# Altium PCB PCB.PcbDoc
Units mm, origin at the board's own origin, x right, y up, seen from the top; angles counter-clockwise.
Board outline 93.98 x 24.13 mm, 2 copper layers (Component Side, Bottom Layer), stack 1.571 mm thick; 85 components, 73 nets, 352 pads, 96 vias.
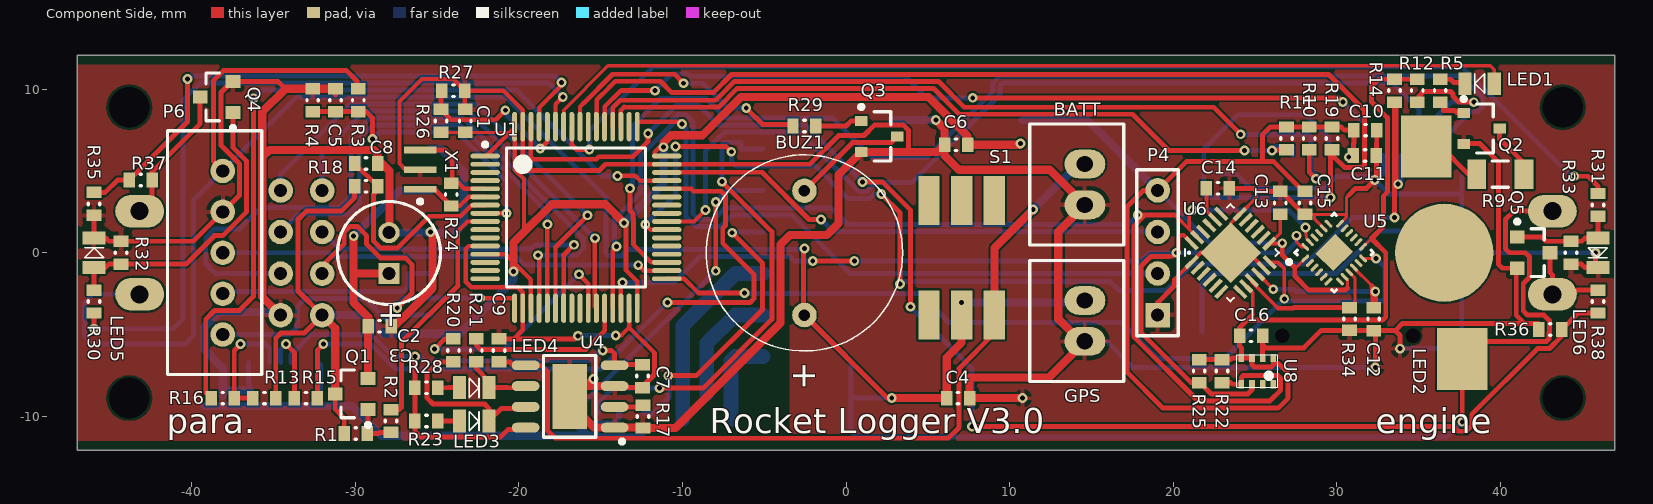
[diagram p0: Component Side view]
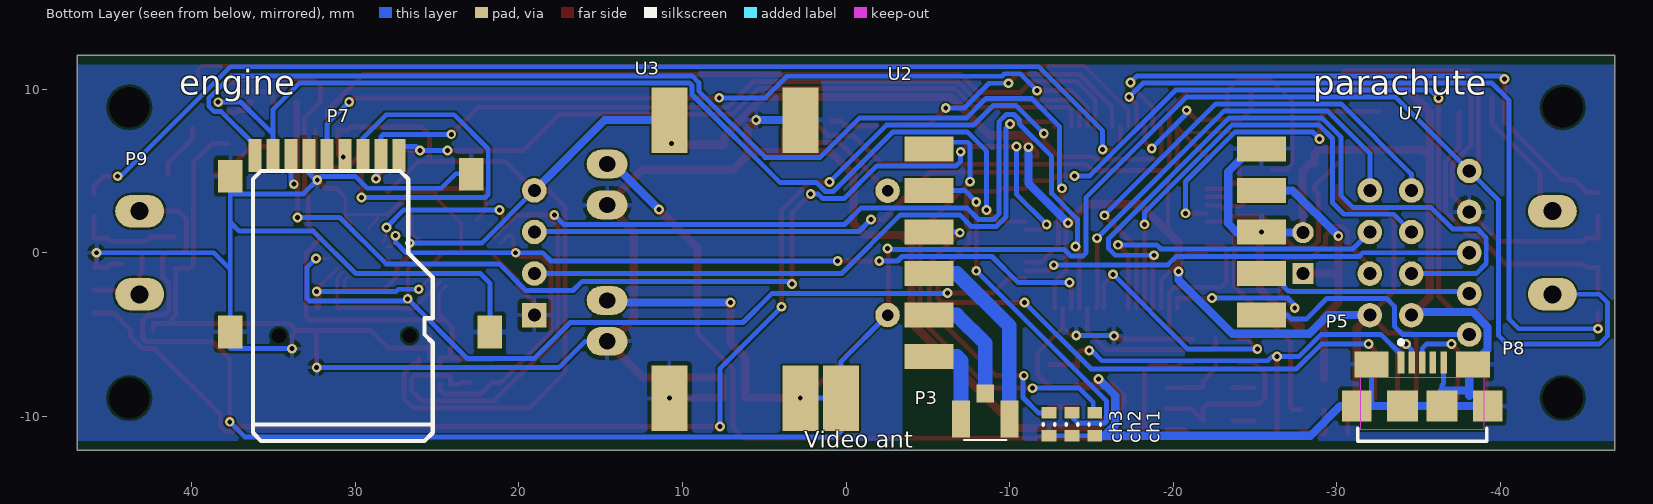
[diagram p1: Bottom Layer view, seen from below]

## Layer stack, top to bottom
Top Solder: solder mask 0.0102, Solder Resist, Dk 3.5
Component Side: signal copper 0.0356
Dielectric 1: core 1.5, FR-4, Dk 4.2
Bottom Layer: signal copper 0.0356
Solder Side: solder mask 0.0102, Solder Resist, Dk 3.5

## Board outline
-46.99,-12.065 -46.99,12.065 46.99,12.065 46.99,-12.065

## Design rules (kind name [scope] priority, off if disabled: settings)
Clearance [All] p1: gap=0.127 ignorepadtopadclearanceinfootprint=TRUE
ComponentClearance [All] p1: gap=0.5 collisioncheckmode=3 verticalgap=0 showdistances=TRUE
HoleSize [All] p1: absolutevalues=TRUE maxlimit=6.3 minlimit=0.2 maxpercent=80.000 minpercent=20.000
HoleToHoleClearance [All] p1: gap=0.254 allowstackedmicrovias=FALSE
MinimumAnnularRing [All] p1: minimumring=0.076
MinimumSolderMaskSliver [All] p1 off: minsoldermaskwidth=0.254
PolygonConnect [All] p1: connectstyle=Relief reliefconductorwidth=0.254 reliefentries=4 polygonreliefangle="90 Angle" airgapwidth=0.254
RoutingVias [All] p1: holewidth=0.3 width=0.6 viastyle="Through Hole" minholewidth=0.3 minwidth=0.6 maxholewidth=0.6 maxwidth=1.27
SMDEntry [All] p1: side=TRUE corner=TRUE anyangle=TRUE
SMDNeckDown [All] p1: percent=90.000
SMDToCorner [All] p1: distance=39370
SilkToSilkClearance [All] p1 off: silktosilkclearance=0.254
SilkToSolderMaskClearance [IsPad] p1 off: minsilkscreentomaskgap=0.254 clearancetoexposedcopper=TRUE
SolderMaskExpansion [All] p1: expansion=0.102
UnRoutedNet [All] p1: checkbadconnections=TRUE
Width [All] p1: maxlimit=2 minlimit=0.127 preferedwidth=0.3
23 further rules are at their usual default settings.

## Components (designator, comment, footprint, x,y, rotation, side; value= is the part's Value field where it differs from the comment)
BATT "BATT" XH2.54-2 14.605,4.171 r270 top (schematic designator P1)
BUZ1 "Buzzer" BUZ12X7,6MM -2.54,3.83 r270 top
C1 "100nF" CAPC0603(1608)100_L -23.279,8.058 r270 top
C2 "680uF 6.3V" CAPPR55-250-1120X630X1220 -27.94,-0.02 r90 top locked
C3 "1uF" CAPC0603(1608)100_L -28.51,-4.491 r0 top
C4 "4.7uF" CAPC0603(1608)100_L 6.858,-8.89 r180 top
C5 "100pF" CAPC0603(1608)100_L -31.211,9.321 r270 top value=100nF
C6 "4.7uF" CAPC0603(1608)100_L 6.731,6.604 r0 top
C7 "1uF" CAPC0603(1608)100_L -12.446,-7.544 r270 top
C8 "100pF" CAPC0603(1608)100_L -29.337,5.461 r180 top value=100nF
C9 "1uF" CAPC0603(1608)100_L -21.209,-5.969 r270 top
C10 "4.7uF" CAPC0603(1608)100_L 31.75,7.493 r180 top
C11 "100nF" CAPC0603(1608)100_L 31.72,5.945 r180 top
C12 "100nF" CAPC0603(1608)100_L 32.258,-4.064 r90 top
C13 "100nF" CAPC0603(1608)100_L 26.543,3.048 r90 top
C14 "2.2nF" CAPC0603(1608)100_L 22.733,3.937 r180 top
C15 "1uF" CAPC0603(1608)100_L 28.067,3.048 r90 top
C16 "100nF" CAPC0603(1608)100_L 24.765,-5.08 r180 top
ch1 "jumper" "RES 0603 (1608) L" -15.209,-10.491 r270 bottom (schematic designator R8)
ch2 "jumper" "RES 0603 (1608) L" -13.812,-10.491 r270 bottom (schematic designator R7)
ch3 "jumper" "RES 0603 (1608) L" -12.415,-10.491 r270 bottom (schematic designator R6)
GPS "EXT_POW" XH2.54-2 14.605,-4.171 r270 top (schematic designator P2)
LED1 "0805 LED" "0805 LED" 38.735,10.338 r180 top
LED2 "3W LED" "3W LED red" 36.576,0 r90 top locked
LED3 "0805 LED" "0805 LED" -22.733,-10.287 r0 top
LED4 "0805 LED" "0805 LED" -22.733,-8.255 r0 top
LED5 "0805 LED" "0805 LED" -45.974,0 r90 top
LED6 "0805 LED" "0805 LED" 45.974,0 r270 top
P3 "IPX" IPX -8.509,-10.16 r0 bottom
P4 "PROG" PLS-4 19.05,-3.81 r90 top
P5 "MicroUsb connector" "MicroUsb connector" -35.23,-9.377 r180 bottom
P6 "XH2.54-5" XH2.54-5 -38.1,0 r270 top locked
P7 "microSD connector" "Micro SD holder + card" 36.12,5.945 r180 bottom locked
P8 "para teminal" screw-con-2 -43.18,-2.54 r90 bottom locked
P9 "engine terminal" screw-con-2 43.18,2.54 r270 bottom locked
Q1 "SI2301" "SOT23-3 L" -30.226,-8.636 r180 top
Q2 "MMBT2222A" INF-SOT23_L 38.862,7.595 r0 top
Q3 "MMBT2222A" INF-SOT23_L 2.032,7.112 r0 top
Q4 "SI2302" "SOT23-3 L" -38.481,9.525 r180 top
Q5 "SI2302" "SOT23-3 L" 42.037,0 r0 top
R1 "10K" "RES 0603 (1608) L" -29.972,-11.049 r180 top
R2 "82R" "RES 0603 (1608) L" -27.813,-10.287 r270 top
R3 "10K" "RES 0603 (1608) L" -29.814,9.321 r270 top
R4 "1.5K" "RES 0603 (1608) L" -32.608,9.321 r90 top
R5 "82R" "RES 0603 (1608) L" 36.322,9.906 r90 top
R9 "5.6R" "RES 1206 (3216) N" 40.005,4.801 r180 top
R10 "10K" "RES 0603 (1608) L" 28.321,6.985 r270 top
R11 "10K" "RES 0603 (1608) L" 26.924,6.985 r270 top
R12 "10K" "RES 0603 (1608) L" 34.925,9.906 r270 top
R13 "1.5K" "RES 0603 (1608) L" -35.56,-8.89 r0 top
R14 "10K" "RES 0603 (1608) L" 33.528,9.906 r270 top
R15 "22R" "RES 0603 (1608) L" -33.02,-8.89 r0 top
R16 "22R" "RES 0603 (1608) L" -38.1,-8.89 r180 top
R17 "1.5K" "RES 0603 (1608) L" -12.415,-10.016 r90 top
R18 "10K" "RES 0603 (1608) L" -29.337,4.064 r0 top
R19 "10K" "RES 0603 (1608) L" 29.718,6.985 r90 top
R20 "1.5K" "RES 0603 (1608) L" -24.003,-5.969 r90 top
R21 "1.5K" "RES 0603 (1608) L" -22.606,-5.969 r90 top
R22 "1.5K" "RES 0603 (1608) L" 22.987,-7.239 r270 top
R23 "1.5K" "RES 0603 (1608) L" -25.654,-10.287 r0 top
R24 "1M" "RES 0603 (1608) L" -24.13,3.556 r90 top
R25 "1.5K" "RES 0603 (1608) L" 21.59,-7.239 r270 top
R26 "jumper" "RES 0603 (1608) L" -24.765,8.058 r270 top
R27 "10K" "RES 0603 (1608) L" -24.003,9.906 r180 top
R28 "1.5K" "RES 0603 (1608) L" -25.654,-8.255 r0 top
R29 "82R" "RES 0603 (1608) L" -2.54,7.747 r180 top
R30 "82R" "RES 0603 (1608) L" -45.974,-2.986 r270 top
R31 "82R" "RES 0603 (1608) L" 45.974,2.921 r90 top
R32 "1.5K" "RES 0603 (1608) L" -44.323,0 r90 top
R33 "1.5K" "RES 0603 (1608) L" 44.323,0 r270 top
R34 "10K" "RES 0603 (1608) L" 30.786,-4.051 r270 top
R35 "10K" "RES 0603 (1608) L" -45.974,2.986 r270 top
R36 "10K" "RES 0603 (1608) L" 43.053,-4.699 r180 top
R37 "1.5K" "RES 0603 (1608) L" -43.115,4.445 r0 top
R38 "1.5K" "RES 0603 (1608) L" 45.974,-2.986 r90 top
S1 "DPDT" "DPDT  5.8mm SMD" 5.57,-3.81 r90 top
U1 "STM32F103RCT6" STM-LQFP64_N -16.51,2.159 r0 top
U2 "TX5823" TX5823 -15.24,1.27 r0 bottom locked
U3 "DC-DC" "DC-DC step up down S9" 2.795,9.11 r270 bottom locked
U4 "TP4056" "SOP-8 N pad" -16.891,-8.788 r180 top
U5 "MPU-9250" QFN40P300X300X105_HS-25L 29.845,0.007 r45 top
U6 "MPU-6050" QFN-24-4MM2 23.495,0 r45 top
U7 "NRF24L01+" "NRF24l01 ant" -34.565,3.803 r270 bottom locked
U8 "BMP280" "LGA-8 BMP280" 25.146,-7.239 r270 top
X1 "8MHz" MURA-CSTCE_G_A-3_V -26.035,5.08 r90 top

## Footprints (in the part's own frame and the unit in brackets; to place one, negate y for a bottom-side part, rotate by r counter-clockwise, add the part's x,y. Pads: shape width x height; smd on the part's side, far side on the other; paste and mask are expansions set on the pad)
"3W LED red" [mm]
  rect 3.8x3.1 smd: A(-6.5,-1.1) K(6.5,1.1)
  round 6 smd: t-pad(0,0)
  body extent -7.09,-4 7.59,4, height 5.96
"0805 LED" [mm] "Chip Resistor, Body 2.0x1.2mm, IPC High Density"
  rect 0.8x1.4 smd: 1(-0.894,0.008) 2(0.903,0.008)
  silkscreen extent -0.3,-0.6 0.3,0.57, body extent -1.1,-0.73 1.1,0.72, height 1.4
BUZ12X7,6MM [mm]
  round 1.5 hole 0.7: 1(0.04,0) 2(7.64,0)
  silkscreen extent -2.16,-6 9.84,6, body extent -2.16,-6 9.84,6, height 9.5
CAPC0603(1608)100_L [mm] "Chip Capacitor, Body 1.6x0.8mm, Height 1.0mm, IPC High Density"
  rect 0.7x0.9 smd: 1(-0.7,0) 2(0.7,0)
  silkscreen extent -0.05,-0.35 0.05,0.35, body extent -0.87,-0.47 0.88,0.48, height 1
CAPPR55-250-1120X630X1220 [mm] "THD, 2-Leads, Dia 6.3mm, Body Length 11.2mm"
  rect 1.3x1.3 hole 0.8: 1(-1.25,0)
  round 1.3 hole 0.8: 2(1.25,0)
  silkscreen extent -3.15,-3.15 3.15,3.15, body extent -3.15,-3.15 3.16,3.15, height 12.21
"DC-DC step up down S9" [mm]
  rect 4x2.2 smd: 1(1,0) 2(1,-8) 3(18,-8) 4(18,0) 5(18,2.5)
  body extent 0,-10.03 19,3.97, height 4.01
"DPDT  5.8mm SMD" [mm]
  rect 3x1.3 smd: 1(0,0.5) 2(0,-1.5) 3(0,-3.5) 4(7,-3.5) 5(7,-1.5) 6(7,0.5)
  body extent -0.85,-4.35 7.85,1.35, height 10.31
INF-SOT23_L [mm] "SOT23, 3-Leads, Body 2.9x1.3 mm, Pitch 0.95 mm, IPC High Density"
  rect 0.75x0.6 smd: 1(-1.1,0.95) 2(-1.1,-0.95) 3(1.1,0)
  silkscreen extent -1.22,-1.5 0.7,1.92, body extent -0.7,-1.5 0.7,1.5, height 1.1
IPX [mm]
  rect 1.1x2.25 smd: 1(-1.475,0) 2(1.475,0)
  rect 1.05x1.1 smd: 3(0,-1.55)
  silkscreen extent -1.3,1.3 1.3,1.3, body extent -1.5,-1.55 1.5,1.3, height 1.29
"LGA-8 BMP280" [mm]
  rect 0.5x0.35 smd paste-25.4 mask-25.4: 1(0.8,0.975) 2(0.8,0.325) 3(0.8,-0.325) 4(0.8,-0.975) 5(-0.8,-0.975) 6(-0.8,-0.325) 7(-0.8,0.325) 8(-0.8,0.975)
  silkscreen extent -1,-1.25 1,1.25, body extent -1,-1.25 1,1.25, height 1
"Micro SD holder + card" [mm]
  rect 1.5x2 smd: 0(-1.524,-10.795) 0(-1.524,-1.27) 0(13.208,-1.143) 0(14.351,-10.795)
  rect 0.8x2 smd: 1(8.8,0) 2(7.7,0) 3(6.6,0) 4(5.5,0) 5(4.4,0) 6(3.3,0) 7(2.2,0) 8(1.1,0) 9(0,0)
  round 0 hole 0.9 unplated: ""(1.45,-11.025) ""(9.45,-11.025)
  silkscreen extent -0.14,-17.45 10.86,-0.95, body extent -1.65,-17.53 14.66,0.18, height 2.25
"MicroUsb connector" [mm] "SMT, 5-Leads, Body 7.9x5mm, Pitch 0.65mm"
  rect 0.4x1.35 smd: 1(-1.3,2.675) 2(-0.65,2.675) 3(0,2.675) 4(0.65,2.675) 5(1.3,2.675)
  rect 2.1x1.6 smd: 6(3.1,2.55) 7(-3.1,2.55)
  rect 1.8x1.9 smd: 8(-4,0) 9(4,0)
  rect 1.9x1.9 smd: 10(1.2,0) 11(-1.2,0)
  Component Side keep-out region: -3.75,1.75 3.75,1.75 3.75,-1.45 -3.75,-1.45
  silkscreen extent -3.95,-2.15 3.95,4.02, body extent -3.9,-2.33 3.9,2.67, height 2.68
MURA-CSTCE_G_A-3_V [mm] "SMD, 3-Leads, Body 3.2x1.3mm, Pitch 1.2mm"
  rect 0.4x2 smd: 1(-1.2,0) 2(0,0) 3(1.2,0)
  silkscreen extent -2.07,-0.12 -1.83,0.12, body extent -1.6,-0.65 1.6,0.65, height 0.7
"NRF24l01 ant" [mm]
  round 1.5 hole 0.8: 1(7.62,0) 2(7.62,-2.54) 3(5.08,0) 4(5.08,-2.54) 5(2.54,0) 6(2.54,-2.54) 7(0,0) 8(0,-2.54)
  body extent -4.13,-41.13 11.83,2.13, height 6
PLS-4 [mm]
  rect 1.5x1.5 hole 0.8: 1(0,0)
  round 1.5 hole 0.8: 2(2.54,0) 3(5.08,0) 4(7.62,0)
  silkscreen extent -1.27,-1.27 8.89,1.27, body extent -1.27,-1.27 8.89,1.27, height 8.44
QFN40P300X300X105_HS-25L [mm] "QFN, 24-Leads, Body 3.00x3.00mm, Pitch 0.40mm, Thermal Pad 1.70x1.54mm, IPC High Density"
  oval 0.6x0.2 smd: 1(-1.5,1) 2(-1.5,0.6) 3(-1.5,0.2) 4(-1.5,-0.2) 5(-1.5,-0.6) 6(-1.5,-1) 13(1.5,-1) 14(1.5,-0.6) 15(1.5,-0.2) 16(1.5,0.2) 17(1.5,0.6) 18(1.5,1)
  oval 0.2x0.6 smd: 7(-1,-1.5) 8(-0.6,-1.5) 9(-0.2,-1.5) 10(0.2,-1.5) 11(0.6,-1.5) 12(1,-1.5) 19(1,1.5) 20(0.6,1.5) 21(0.2,1.5) 22(-0.2,1.5) 23(-0.6,1.5) 24(-1,1.5)
  rect 1.7x1.54 smd: 25(0,0)
  silkscreen extent -2.47,-1.7 1.7,1.7, body extent -1.55,-1.55 1.55,1.55, height 1.05
QFN-24-4MM2 [mil]
  rect 40x10 smd paste-1000 mask-1000: 1(-81.35,49.48) 2(-81.35,29.51) 3(-81.35,9.74) 4(-81.35,-11.32) 5(-81.35,-31.18) 6(-81.35,-51.05) 13(82.13,-51.05) 14(82.13,-31.18) 15(82.13,-11.32) 16(82.13,9.74) 17(82.13,29.51) 18(82.13,49.48)
  rect 10x40 smd paste-1000 mask-1000: 7(-49.87,-83.53) 8(-30,-83.53) 9(-10.14,-83.53) 10(10.92,-83.53) 11(30.69,-83.53) 12(50.66,-83.53) 19(50.66,81.95) 20(30.69,81.95) 21(10.92,81.95) 22(-10.14,81.95) 23(-30,81.95) 24(-49.87,81.95)
  rect 103x103 smd mask-1000: 18(0.79,-0.39)
  silkscreen extent -83,-83 83,83, body extent -80,-80 80,80, height 35
"RES 0603 (1608) L" [mm] "Chip Resistor, Body 1.6x0.8mm, IPC High Density"
  rect 0.7x0.9 smd: 1(-0.7,0) 2(0.7,0)
  silkscreen extent -0.05,-0.35 0.05,0.35, body extent -0.8,-0.4 0.8,0.4, height 0.45
"RES 1206 (3216) N" [mm] "Chip Resistor, Body 3.2x1.6mm, IPC Medium Density"
  rect 1.15x1.8 smd: 1(-1.45,0) 2(1.45,0)
  silkscreen extent -0.5,-0.8 0.5,0.8, body extent -1.55,-0.77 1.55,0.78, height 0.55
screw-con-2 [mm] "2.54"
  oval 2x3 hole 1.1: 1(0,0) 2(5.08,0)
  body extent -2.46,-3.74 7.54,4.06, height 10.2
"SOP-8 N pad" [mm] "TSOP, 8-Leads, Body 4,90x3,95mm, Pitch 1,27mm, Thermal Pad 4,00x2,10mm, IPC Medium Density"
  oval 1.7x0.6 smd: 1(-2.746,1.905) 2(-2.746,0.635) 3(-2.746,-0.635) 4(-2.746,-1.905) 5(2.692,-1.905) 6(2.692,-0.635) 7(2.692,0.635) 8(2.692,1.905)
  rect 2.1x4 smd: PAD(0,0)
  silkscreen extent -3.33,-2.5 1.6,2.88, body extent -3.02,-2.51 3.02,2.51, height 1.6
"SOT23-3 L" [mm] "SOT23, 3-Leads, Body 2.92x1.3mm, Pitch 0.95mm"
  rect 0.9x0.8 smd: 1(-1,0.95) 2(-1,-0.95) 3(1,0)
  silkscreen extent -1.13,-1.46 0.65,2.02, body extent -1.25,-1.5 1.25,1.5, height 1.11
STM-LQFP64_N [mm] "Thin QFP, 64-Leads, Body 10x10mm, Pitch 0.5mm, IPC Medium Density"
  oval 1.8x0.3 smd: 1(-5.55,3.75) 2(-5.55,3.25) 3(-5.55,2.75) 4(-5.55,2.25) 5(-5.55,1.75) 6(-5.55,1.25) 7(-5.55,0.75) 8(-5.55,0.25) 9(-5.55,-0.25) 10(-5.55,-0.75) 11(-5.55,-1.25) 12(-5.55,-1.75) 13(-5.55,-2.25) 14(-5.55,-2.75) 15(-5.55,-3.25) 16(-5.55,-3.75) 33(5.55,-3.75) 34(5.55,-3.25) 35(5.55,-2.75) 36(5.55,-2.25) 37(5.55,-1.75) 38(5.55,-1.25) 39(5.55,-0.75) 40(5.55,-0.25) 41(5.55,0.25) 42(5.55,0.75) 43(5.55,1.25) 44(5.55,1.75) 45(5.55,2.25) 46(5.55,2.75) 47(5.55,3.25) 48(5.55,3.75)
  oval 0.3x1.8 smd: 17(-3.75,-5.55) 18(-3.25,-5.55) 19(-2.75,-5.55) 20(-2.25,-5.55) 21(-1.75,-5.55) 22(-1.25,-5.55) 23(-0.75,-5.55) 24(-0.25,-5.55) 25(0.25,-5.55) 26(0.75,-5.55) 27(1.25,-5.55) 28(1.75,-5.55) 29(2.25,-5.55) 30(2.75,-5.55) 31(3.25,-5.55) 32(3.75,-5.55) 49(3.75,5.55) 50(3.25,5.55) 51(2.75,5.55) 52(2.25,5.55) 53(1.75,5.55) 54(1.25,5.55) 55(0.75,5.55) 56(0.25,5.55) 57(-0.25,5.55) 58(-0.75,5.55) 59(-1.25,5.55) 60(-1.75,5.55) 61(-2.25,5.55) 62(-2.75,5.55) 63(-3.25,5.55) 64(-3.75,5.55)
  silkscreen extent -5.67,-4.25 4.25,4.57, body extent -5,-5 5,5, height 1.6
TX5823 [mm] "FPV video transmitter module 200mW"
  rect 3x1.524 smd: 1(-10.16,5.08) 2(-10.16,2.54) 3(-10.16,0) 4(-10.16,-2.54) 5(-10.16,-5.08) 6(10.16,-5.08) 7(10.16,-2.54) 8(10.16,0) 9(10.16,2.54) 10(10.16,5.08) 11(10.16,7.62)
  body extent -11,-9.68 11,9.32, height 3.01
XH2.54-2 [mm]
  oval 1.75x2.5 hole 1: 1(-1.25,0) 2(1.25,0)
  silkscreen extent -3.7,-3.38 3.7,2.38, body extent -3.7,-3.38 3.7,2.38, height 7
XH2.54-5 [mm]
  round 1.5 hole 0.8: 1(-5,0) 2(-2.5,0) 3(0,0) 4(2.5,0) 5(5,0)
  silkscreen extent -7.45,-3.38 7.45,2.38, body extent -7.45,-3.38 7.45,2.38, height 7

## Part data
BATT GPS: library part XH2.54-2
BUZ1: "Active buzzer 5v"
C1 C3 C5 C7 C8 C9 C11 C12 C13 C16: library part CMP-1035-02585-1, "CAP 100nF 16V ±20% 0603 (1608 Metric) Thickness 1mm SMD", Case-EIA=0603, Case-Metric=1608, Rated Voltage="16 V", Tolerance=A±20%, Max Thickness="1 mm", Technology=SMT
C2: library part CMP-1665-00015-4, "Aluminum Electrolytic Capacitor (Radial Lead Type), 100 uF, 35 V, -40 to 85 degC, 2-Pin THD, RoHS, Bulk", Manufacturer=Panasonic, Max Operating Temperature="85 degC", Min Operating Temperature="-40 degC", Package Quantity=200, Voltage Rating="35 V", ComponentLink1Description="Manufacturer URL", ComponentLink1URL=http://www.panasonic.com/, ComponentLink2Description=Datasheet, ComponentLink2URL=http://industrial.panasonic.com/cdbs/www-data/pdf/RDF0000/ABA0000C1047.pdf, DatasheetVersion=03/2016, Height="11.2 mm", Lead Pitch="2.5 mm", Length="11.2 mm", Mount="Through Hole", Mounting Technology="Through Hole", PackageDescription="2-Pin Through Hole Device, Dia 6.3 mm, Body Length 11.2 mm", PackageReference=Radial, Packaging=Bulk, Pins=2, REACH SVHC="No SVHC", RoHSCompliant=true
C4 C6 C10: library part CMP-1035-02789-1, "CAP 4.7uF 16V ±20% 0603 (1608 Metric) Thickness 1mm SMD", Case-EIA=0603, Case-Metric=1608, Rated Voltage="16 V", Tolerance=A±20%, Max Thickness="1 mm", Technology=SMT
C14: library part CMP-1035-02030-1, "CAP 2.2nF 16V ±20% 0603 (1608 Metric) Thickness 1mm SMD", Case-EIA=0603, Case-Metric=1608, Rated Voltage="16 V", Tolerance=A±20%, Max Thickness="1 mm", Technology=SMT
C15: library part CMP-1035-02312-1, "CAP 10nF 16V ±20% 0603 (1608 Metric) Thickness 1mm SMD", Case-EIA=0603, Case-Metric=1608, Rated Voltage="16 V", Tolerance=A±20%, Max Thickness="1 mm", Technology=SMT
ch1 ch2 ch3 R1 R2 R3 R4 R5 R10 R11 R12 R13 R14 R15 R16 R17 R18 R19 R20 R21 R22 R23 R24 R25 R26 R27 R28 R29 R30 R31 R32 R33 R34 R35 R36 R37 R38: library part "Res 0603", Case-EIA=0603, Case-Metric=1608, Power=0.1W, Technology=SMT
LED1 LED3 LED4 LED5 LED6: "0805", LatestRevisionDate=08-Jul-2005, LatestRevisionNote="Mech Layer 1 removed.", PackageDescription="LED; 2 Leads", PackageReference=LED-0, Published=8-Jun-2000, Publisher="Altium Limited"
LED2: "3W or 1W led without PCB star"
P4: library part PLS-4, "Single row pins"
P7: library part microSD, "microSD holder", LatestRevisionDate=17-Jul-2002, LatestRevisionNote="Re-released for DXP Platform.", Publisher="Altium Limited"
P8 P9: library part screw-con-2, "screw con 2-pin, 5.08mm pitch", LatestRevisionDate=17-Jul-2002, LatestRevisionNote="Re-released for DXP Platform.", Publisher="Altium Limited"
Q1: "P-ch MOSFET 2.8A 20V"
Q2 Q3: library part CMP-1178-00009-1, "NPN Silicon Switching Transistor, 40 V VCEO, 600 mA IC, SOT23, Reel, Green", Manufacturer=Infineon, ComponentLink1Description="Manufacturer URL", ComponentLink1URL=http://www.infineon.com/, ComponentLink2Description=Datasheet, ComponentLink2URL=http://www.infineon.com/dgdl/smbt2222a_mmbt2222a.pdf?folderId=db3a30431441fb5d011445fab851018e&fileId=db3a30431441fb5d011445fbaff0018f, ComponentLink3Description="Package Specification", ComponentLink3URL=http://www.infineon.com/dgdl/SOT23-Package_Overview.pdf?folderId=db3a30431936bc4b0119532290053c66&fileId=db3a30431936bc4b0119533468123c85, Green=TRUE, IC="150 mA", IC (max)="600 mA", ICBO (max)="10 nA", Mounting Technology="Surface Mount", PackageDescription="3-Pin Small Outline Transistor Package, 1.3 x 2.9 mm Body, 0.95 mm Pitch", PackageReference=SOT23, PackageVersion=Apr-08, Packing=Reel, PartNumber=MMBT2222A, Polarity=NPN, VCBO (max)="75 V", VCE="10 V", VCE (max)="10 V", VCEO (max)="40 V", VEBO (max)="6 V"
Q4 Q5: "N-ch MOSFET 3A 20V"
R9: library part "Res 1206", Case-EIA=1206, Case-Metric=3216, Power=0.25W, Technology=SMT
S1: library part "Double switch", "Different footprints", LatestRevisionDate=17-Jul-2002, LatestRevisionNote="Re-released for DXP Platform.", PackageDescription="Switch; 6 Leads", PackageReference=DPDT-6, Published=24-Mar-1999, Publisher="Altium Limited"
U1: library part CMP-0237-00009-4, "ARM Cortex-M3 32-bit MCU, 256 KB Flash, 48 KB Internal RAM, 51 I/Os, 64-pin LQFP, -40 to 85 degC, Tray", I/Os (High Current)=51, Operating Frequency(F) (Processor speed) (MHz)=72, Supply Voltage(Vcc) min (V)=2, A/D Converter="3x12-bit (16 Channel)", ComponentLink1Description="Manufacturer URL", ComponentLink1URL=http://www.st.com/web/en/home.html, ComponentLink2Description=Datasheet, ComponentLink2URL=http://www.st.com/st-web-ui/static/active/en/resource/technical/document/datasheet/CD00191185.pdf, ComponentLink3Description="Package Specification", ComponentLink3URL=http://www.st.com/st-web-ui/static/active/en/resource/technical/document/datasheet/DM00037051.pdf, Core="ARM Cortex-M3", D/A Converter="2x12-bit (2 Channel)", DatasheetVersion="Rev. 8", FLASH Size (Prog) (kB)=256, Internal RAM Size (kB)=48, Mounting Technology="Surface Mount", PackageDescription="64-Pin Low Profile Quad Flat Package, 10 x 10 mm Body, 0.5 mm Pitch", PackageReference=LQFP64, PackageVersion="Rev. 4, 06/2013", Packing=Tray, PartNumber=STM32F103RCT6
U2: "FPV video transmitter 200mW"
U3: library part "DC-DC step up down S9"
U4: "Li battery charger IC"
U7: "Wirless module 2.4GHz"
X1: library part CMP-2100-03620-1, "Ceramic Resonator, 8 MHz, +/- 0.5%, -20 to 80 degC, 3-Pin SMD, RoHS, Tape and Reel", Capacitance=33pF, Case/Package=Ceramic, Frequency Stability=0.2%, Frequency Tolerance=0.5%, Manufacturer=Murata, Max Operating Temperature=80degC, Min Operating Temperature=-20degC, Package Description="3-Pin Surface Mount Device, Body 3.2 x 1.3 mm, Pitch 1.2 mm", Package Quantity=1, Package Reference=CSTCE_G_A-3, Composition=Ceramic, Contact Plating=Gold, Datasheet URL=http://www.murata.com/~/media/webrenewal/support/library/catalog/products/timingdevice/ceralock/p16e.ashx, Datasheet Version=42339.0, Frequency=8MHz, Height=0.031inch, Lead Free=LeadFree, Length=0.126inch, Load Capacitance=33pF, Manufacturer URL=http://www.murata.com/, Mount=SurfaceMount, Number of Pins=3, Packaging=TapeandReel, REACH SVHC=NoSVHC, RoHSCompliant=True, Self Resonant Frequency=8MHz, Termination=SMD/SMT, Tolerance=0.5%, Width=0.051inch

## Free pads (board coordinates)
  round 0 hole 2.5: ""(-43.815,-8.89) ""(-43.815,8.89) ""(43.815,-8.89) ""(43.815,8.89)

## Via types
v1: diameter 0.6, hole 0.3, Component Side to Bottom Layer, tented both sides, 96 vias

## Nets (pads, with @x,y where several pads share a name; then routed paths per layer and width w, separated by ;. In a path a pad name is that pad's centre, name@x,y a point inside that pad or via, vN(x,y) a via of type N, cw(c..) or ccw(c..) an arc to the next point about the centre after c; other vN are vias at no path point)
3.3V: C1.2 C6.2 C10.2 C11.2 C13.1 C15.2 C16.2 P4.4 P7.4 Q1.3 R1.2 R10.1 R11.1 R12.1 R13.2 R14.1 R18.1 R19.2 R22.1 R25.1 R26.2 U1.1 U1.13 U1.19 U1.32 U1.48 U1.64 U3.2 U5.1 U5.8 U5.13 U6.8 U6.13 U7.2 U8.5 U8.6 U8.8 | length 219.6
  Component Side w0.18: R26.2 C1.2 -20.598,7.358 U1.64@-20.26,7.696 ; 27.432,-0.903 27.52,-0.903 U5.1 ; U5.8 30.658,-1.654 30.658,-2.159 ; U5.13 32.123,0.871
  Component Side w0.229: U6.8 24.867,-2.449 24.867,-3.77 ; U6.13 U6.13@25.912,0.558 ; C13.1 26.543,1.189 U6.13@25.912,0.558 ; v1(26.67,0.584) 26.644,0.558 U6.13@25.912,0.558
  Component Side w0.27: U1.13 -20.828,-0.091 -20.32,-0.599 -19.26,-1.659 U1.19 ; U1.1 -21.996,5.909 U1.64@-20.26,7.645 ; U1.64@-20.26,7.696 U1.64@-20.26,7.645 ; -19.685,1.263 -19.685,4.505 -20.26,5.08 U1.64@-20.26,7.645 ; -13.444,-1.069 -12.76,-1.753 U1.32 ; v1@-11.405,6.452 -11.709,6.147 -11.709,5.909 U1.48
  Component Side w0.3: R13.2 -34.86,-5.223 -34.544,-4.907 -33.115,-4.907 U7.2 -33.503,-2.339 -33.503,2.032 -32.995,2.54 -30.861,2.54 -30.037,3.364 R18.1 ; Q1.3 -31.226,-9.581 -30.672,-10.135 R1.2 ; v1(-13.564,1.822) -13.444,1.702 -13.444,-1.069 ; R25.1 R22.1 23.52,-6.539 23.62,-6.439 U8.5 ; 24.867,-3.77 24.522,-4.115 ; U8.8 26.121,-6.756 ; v1(26.67,0.584) 26.67,-0.141 27.432,-0.903 27.432,-1.422 28.296,-2.286 30.531,-2.286 30.658,-2.159 ; C15.2 27.965,3.748 26.125,5.588 25.458,5.588 ; C11.2 31.02,6.68 31.05,6.71 C10.2 30.469,7.493 30.277,7.685 R19.2 R10.1 R11.1 25.935,7.685 25.458,7.208 25.458,5.588 ; R12.1 R14.1 32.559,10.606 32.125,10.172 32.125,9.226 33.096,8.255 33.096,3.704 32.872,3.48 32.872,1.62 32.123,0.871 32.995,0 32.995,-3.937 32.817,-4.115 24.522,-4.115 ; U8.5 U8.6 24.821,-6.858 24.948,-6.985 25.994,-6.985 26.121,-6.858 26.121,-6.756 ; U8.5 24.171,-5.817 24.065,-5.711 C16.2 24.065,-4.572 24.522,-4.115 ; 25.458,5.588 20.828,5.588 P4.4 18.185,3.81 17.169,2.794 17.169,-7.288 19.38,-9.5 26.416,-9.5 27.026,-8.89 27.026,-7.366 26.416,-6.756 26.121,-6.756
  Component Side w0.5: U7.2 -31.226,-4.616 Q1.3 ; v1(-20.32,-1.143) -20.32,-0.599 -20.32,0.628 -19.685,1.263 -17.985,2.963 -14.705,2.963 v1(-13.564,1.822) ; v1(-11.151,6.452) -11.151,6.723 -10.694,7.179 -8.764,7.179 -6.427,9.516 5.041,9.516 7.431,7.127 C6.2 10.599,6.604 v1(10.668,6.673)
  Bottom Layer w0.3: -27.015,-4.849 -26.997,-4.849 ; U3.2@10.795,8.103 U3.2 ; P4.4 22.276,0.584 v1(26.67,0.584)
  Bottom Layer w0.5: U7.2 -29.474,-3.817 -28.342,-4.949 -23.598,-4.949 -20.32,-1.671 v1(-20.32,-1.143) ; v1(-13.564,1.822) -11.151,4.236 v1(-11.151,6.452) ; U3.2 14.75,8.11 P4.4
  other v1: 30.734,5.842
adc: C5.2 R3.2 R4.1 U1.8 | length 18
  Component Side w0.27: U1.8 v1(-20.752,2.409)
  Component Side w0.3: R4.1 C5.2 R3.2 -29.337,8.621 -28.956,8.24 v1(-28.956,6.954)
  Bottom Layer w0.3: v1(-28.956,6.954) -28.521,7.389 -23.785,7.389 -20.752,4.356 v1(-20.752,2.409)
BATT+: BUZ1.2 C4.2 GPS.1 LED2.A P6.1 P8.1 P9.1 R3.1 S1.2 U3.4 U3.5 | length 182.9
  Component Side w0.3: P6.1 -38.659,5.559 -38.659,10.541 -38.048,11.152 -30.558,11.152 -29.896,10.49 -29.896,10.021 R3.1 ; v1(-2.54,0.254) -2.609,0.185 -2.609,-3.741 BUZ1.2 2.54,-8.89 v1(2.795,-8.89) ; C4.2 C4.2@6.158,-8.788 ; v1(37.676,-10.338) LED2.A 38.75,-5.426 42.818,-5.426 42.98,-5.264 42.98,-4.868 43.002,-4.846 43.002,-4.147 42.672,-3.817 41.664,-3.817 41.403,-3.556 41.403,-1.88 41.783,-1.5 41.783,-0.254 41.529,0 40.564,0 40.31,0.254 40.31,2.032 40.818,2.54 P9.1
  Component Side w0.5: v1(2.795,-8.89) C4.2 ; C4.2@6.158,-8.788 6.158,-6.415 7.07,-5.503 S1.2 v1(7.07,-3.048)
  Bottom Layer w0.3: P8.1 -46.05,-2.54 -46.558,-3.048 -46.558,-5.08 -46.05,-5.588 -40.411,-5.588 -39.878,-5.055 -39.878,3.222 P6.1 -33.576,9.524 -20.824,9.524 -14.681,3.381 -14.681,0 -14.478,-0.203 -13.741,-0.203 -13.342,0.196 -2.598,0.196 v1(-2.54,0.254) ; BUZ1.2 0.295,-6.645 U3.5 ; v1(2.795,-8.89) 0.498,-8.89 0.397,-8.788 U3.5 ; v1(37.676,-10.338) 36.736,-11.278 0.651,-11.278 0.295,-10.922 U3.5
  Bottom Layer w0.5: v1(7.07,-3.048) 14.478,-3.048 GPS.1
batt_cathode: BATT.1 C9.2 S1.3 U4.5 | length 52
  Component Side w0.3: C9.2 -20.574,-6.669 -20.258,-6.985 U4.5@-19.583,-6.985 ; U4.5 -18.627,-6.883 -18.237,-7.273 -18.237,-10.884 -17.778,-11.343 6.259,-11.343 6.909,-10.693 6.909,-7.087 9.07,-4.925 S1.3
  Component Side w0.5: S1.3 9.07,0.286 v1(11.43,2.646)
  Bottom Layer w0.5: v1(11.43,2.646) 14.205,5.421 BATT.1
buzzer_tr: R29.2 U1.56 | length 16.3
  Component Side w0.27: U1.56 -16.26,8.927 -16.043,9.144
  Component Side w0.3: -16.043,9.144 -14.277,10.91 -10.478,10.91 v1(-9.931,10.363) ; v1(-6.096,8.839) -5.095,7.839 R29.2@-3.332,7.839 ; v1@-6.096,8.89 v1@-6.071,8.865
  Bottom Layer w0.3: v1(-9.931,10.363) -8.741,10.363 -7.217,8.839 v1(-6.096,8.839)
camAudio: P6.4 U2.2 | length 13.7
  Bottom Layer w0.3: P6.4 -37.963,-2.363 -27.21,-2.363 -27.192,-2.344 -27.033,-2.344 -26.746,-2.057 -26.746,-1.27 U2.2
camBtn: P6.3 U1.34 | length 27.6
  Component Side w0.27: v1(-12.7,-0.762) -12.371,-1.091 U1.34
  Bottom Layer w0.3: P6.3 -31.598,0 -31.369,-0.229 -20.193,-0.229 -19.678,-0.744 -12.718,-0.744 v1(-12.7,-0.762)
camEN: R2.1 U1.9 | length 14.8
  Component Side w0.27: -23.724,-2.015 -23.724,1.329 -23.144,1.909 U1.9
  Component Side w0.3: R2.1 -27.305,-9.587 -27.178,-9.46 -27.178,-5.469 -23.724,-2.015
camVideo: P6.5 U2.1 | length 15
  Bottom Layer w0.3: P6.5 -34.036,-5 -33.528,-4.492 -33.528,-3.272 -33.045,-2.79 -29.403,-2.79 -28.129,-4.064 -27.229,-4.064 -26.975,-3.81 U2.1
card_exists: P7.9 U1.35 | length 71.9
  Component Side w0.27: -12.954,0.457 -11.906,-0.591 U1.35
  Component Side w0.3: v1(-13.208,3.937) -13.208,2.569 -13.017,2.378 -13.017,2.091 -12.987,2.061 -12.987,0.49 -12.954,0.457
  Bottom Layer w0.3: v1(-13.208,3.937) -13.044,4.101 -13.044,7.73 -11.342,9.432 -8.56,9.432 -7.371,8.243 -0.83,8.243 1.58,5.833 4.944,5.833 8.991,9.88 8.991,10.402 9.403,10.814 37.587,10.814 38.96,9.442 38.96,8.964 38.622,8.626 38.193,8.626 36.12,6.553 P7.9
CARDCS: U1.16
CHARGE_VCC: C7.1 P5.1 R23.1 R28.1 U4.4 U4.8 | length 36
  Component Side w0.3: v1(-26.354,-6.35) R28.1 R23.1 -26.354,-10.922 -25.998,-11.278 -21.133,-11.278 -20.65,-10.795 U4.8@-19.583,-10.795 ; v1(-14.872,-5.969) -14.351,-5.969 -14.145,-6.175 U4.4 -14.145,-6.985 -14.004,-6.844 C7.1
  Bottom Layer w0.3: P5.1 -33.93,-6.223 -32.711,-5.004 -29.032,-5.004 -27.686,-6.35 v1(-26.354,-6.35) -26.035,-6.35 -25.781,-6.604 -15.646,-6.604 -15.011,-5.969 v1(-14.872,-5.969)
CHECKE: R36.1 R38.1 U1.62 | length 86.2
  Component Side w0.27: -19.26,5.842 U1.62
  Component Side w0.3: -19.26,5.842 -19.133,5.715 -15.265,5.715 -15.113,5.867 -13.03,5.867 -12.093,6.805 v1(-12.093,7.296) ; v1(1.016,4.318) 2.238,4.318 3.937,2.619 v1(3.937,-3.302) ; v1(7.696,-10.617) 37.139,-10.617 37.437,-10.915 37.915,-10.915 38.253,-10.577 38.253,-9.88 42.28,-5.853 43.009,-5.853 43.753,-5.109 R36.1 44.766,-3.686 R38.1
  Bottom Layer w0.3: v1(-12.093,7.296) -10.383,9.005 -9.017,9.005 -7.828,7.816 -2.482,7.816 v1(1.016,4.318) ; v1(3.937,-3.302) 7.696,-7.061 v1(7.696,-10.617)
CHECKP: R35.1 R37.1 U1.61 | length 36.5
  Component Side w0.27: U1.61 -18.76,8.871 -17.384,10.247 v1(-17.384,10.414)
  Component Side w0.3: R35.1 -45.288,3.686 -44.529,4.445 R37.1 -40.259,8.001 v1(-40.259,10.622)
  Bottom Layer w0.3: v1(-40.259,10.622) -40.074,10.807 -17.777,10.807 v1(-17.384,10.414)
chg_cpt: LED4.2 R21.1 U4.6 | length 4.1
  Component Side w0.3: R21.1 -22.606,-7.073 -21.83,-7.849 LED4.2 -20.726,-8.247 -20.718,-8.255 U4.6@-19.583,-8.255
chging: LED3.2 R20.1 U4.7 | length 10.8
  Component Side w0.3: R20.1 -24.892,-6.669 -25.603,-7.38 -25.603,-8.89 -25.248,-9.246 -22.098,-9.246 -21.83,-9.514 LED3.2 -21.076,-9.525 U4.7@-19.583,-9.525
ENGINE: P9.2 Q5.3 R38.2 | length 5.5
  Component Side w0.3: Q5.3 43.037,-1.203 43.18,-1.346 P9.2 44.45,-2.54 44.704,-2.286 R38.2
engine_tr: R31.2 U1.57 | length 70.2
  Component Side w0.27: U1.57 -16.76,6.604 -16.458,6.302 v1(-15.693,6.302)
  Component Side w0.3: v1(44.526,4.674) 45.364,4.674 45.974,4.064 R31.2
  Bottom Layer w0.3: v1(-15.693,6.302) -15.693,7.446 -11.772,11.367 37.638,11.367 44.332,4.674 v1(44.526,4.674)
GND: BATT.2 C1.1 C2.2 C3.2 C4.1 C5.1 C6.1 C7.2 C8.1 C9.1 C10.1 C11.1 C12.1 C13.2 C14.1 C15.1 C16.1 ch1.2 ch2.2 ch3.2 GPS.2 LED5.2 LED6.2 P4.1 P5.5 P5.6 P5.7 P5.8 P5.9 P5.10 P5.11 P6.2 P7.0 P7.6 Q2.2 Q3.2 Q4.2 Q5.2 R4.2 R17.1 R27.1 R32.2 R33.2 R34.2 R35.2 R36.2 U1.12 U1.18 U1.31 U1.47 U1.63 U2.3 U2.5 U3.1 U3.3 U4.1 U4.3 U4.PAD U5.18 U5.20 U6.1 U6.11 U6.18 U7.1 U8.7 X1.2 | length 418.1
  Component Side w0.18: C15.1 28.651,2.348 ; U5.20 28.651,2.049 28.651,2.348 ; U5.18 30.607,2.183 ; 30.734,3.521 30.607,3.394 30.607,2.183 ; 28.651,2.348 30.442,2.348 30.607,2.183
  Component Side w0.229: 20.091,-1.626 U6.1 21.145,-0.546 21.699,0.007 U6.18@23.516,0.007 ; 25.081,3.748 25.081,3.363 24.082,2.364 24.082,2.362 23.516,1.797 U6.18@23.516,0.007 ; U6.11 25.546,-0.934 24.606,0.007 U6.18@23.516,0.007
  Component Side w0.27: X1.2 -26.924,5.08 -27.297,5.453 -27.297,9.244 -25.923,10.618 -24.015,10.618 R27.1 ; C1.1 -23.303,8.782 R27.1 ; -23.241,-1.778 -23.241,0.229 -23.061,0.409 U1.12 ; -22.911,-2.108 -20.066,-2.108 -19.76,-2.414 U1.18 -19.76,-4.709 -20.32,-5.269 ; -19.76,5.334 U1.63 -19.76,8.721 -20.945,9.906 R27.1 ; -14.704,5.409 U1.47 -9.398,5.409 ; v1(-14.079,-5.062) -13.75,-5.062 -13.26,-4.572 ; U1.31 -13.26,-4.572 ; -11.709,-6.123 -13.26,-4.572
  Component Side w0.3: R35.2 -45.974,1.583 -45.982,1.575 LED5.2 -45.263,0.903 -45.06,0.7 R32.2 -39.9,0.7 P6.2 -37.073,3.527 -37.073,5.425 -38.208,6.56 -38.208,9.798 Q4.2@-37.506,10.5 ; Q4.2 -34.732,10.475 -34.278,10.021 ; -31.217,9.652 C5.1@-31.217,10.021 ; C2.2 -27.94,5.029 ; -23.241,-1.778 -22.911,-2.108 ; C9.1 -20.32,-5.269 -16.572,-5.269 v1(-16.383,-5.08) ; -19.76,5.334 -19.449,5.023 -15.09,5.023 -14.704,5.409 ; U4.3 -14.055,-8.244 C7.2 -12.446,-8.18 -11.709,-7.443 -11.709,-6.123 ; -9.398,5.409 -2.211,5.409 -0.454,7.166 1.103,7.166 1.749,7.812 3.499,7.812 3.81,7.501 3.81,6.162 ; P4.1 19.05,-3.048 20.091,-2.007 20.091,-1.626 ; C14.1 24.892,3.937 25.081,3.748 C13.2 26.594,3.748 27.994,2.348 C15.1 ; C16.1 25.465,-5.628 ; U8.7 25.471,-5.766 25.465,-5.76 25.465,-5.628 ; 30.734,3.521 31.15,3.937 31.819,3.937 v1(32.327,4.445) 32.42,4.538 C11.1 32.42,6.68 32.45,6.71 C10.1 ; v1(32.36,-7.01) C12.1@32.36,-4.764 ; v1(33.868,-5.866) 33.868,-5.057 33.575,-4.764 ; Q2.2@37.762,6.67 38.76,6.67 39.878,5.552 39.878,-0.696 40.132,-0.95 Q5.2@40.976,-0.95 ; Q5.2 Q5.2@40.976,-0.95 ; R36.2 42.353,-4.318 41.476,-4.318 ; R33.2 44.979,-0.7 45.182,-0.903 LED6.2@45.822,-0.903 ; v1(45.822,0) LED6.2@45.822,-0.903 ; LED6.2 LED6.2@45.822,-0.903 ; 25.465,-5.628 25.654,-5.817 27.992,-5.817 29.058,-4.751 R34.2 31.496,-4.751 31.509,-4.764 C12.1 C12.1@32.36,-4.764 ; C12.1@32.36,-4.764 33.575,-4.764 ; 33.575,-4.764 34.021,-4.318 41.476,-4.318 ; Q5.2@40.976,-0.95 40.976,-3.818 41.476,-4.318
  Component Side w0.5: U7.1 -35.692,-2.69 -35.692,5.842 ; C5.1@-31.217,10.021 R4.2 -34.278,10.021 -35.692,8.607 -35.692,5.842 ; C2.2 -27.91,1.26 -27.91,4.999 -27.94,5.029 -28.372,5.461 C8.1 -28.637,6.057 -28.857,6.277 -29.236,6.277 -29.248,6.288 -35.246,6.288 -35.692,5.842 ; C3.2 -27.605,-4.491 -27.169,-4.055 -27.152,-4.055 -25.273,-2.177 -25.273,1.143 v1(-25.4,1.27) ; U4.PAD@-16.891,-8.89 -16.891,-9.209 -15.407,-10.693 U4.1 -12.438,-10.693 R17.1 -10.428,-10.716 -4.004,-4.292 -4.004,0.51 -3.43,1.083 -1.172,1.083 -0.465,1.79 -0.465,4.765 Q3.2 3.81,6.162 5.589,6.162 C6.1 ; U4.PAD -16.256,-8.153 U4.PAD@-15.872,-8.153 ; v1(-15.443,-7.725) U4.PAD@-15.872,-8.153 ; U4.3 U4.PAD@-15.872,-8.153 ; v1(5.49,8.11) 6.031,7.569 C6.1 ; v1(10.795,-8.89) C4.1 7.558,-7.62 12.406,-7.62 GPS.2 14.335,-5.421 12.978,-4.064 12.978,1.294 BATT.2 12.459,5.067 6.918,5.067 6.031,5.954 C6.1
  Bottom Layer w0.3: P5.5 -36.53,-8.003 -36.43,-8.103 -36.43,-8.415 ; -32.385,-9.377 -32.13,-9.122 P5.7 ; P5.8 P5.8@-31.217,-9.377 ; v1(-16.383,-5.08) -16.365,-5.062 v1(-14.079,-5.062) ; ch1.2 ch2.2 ch3.2 ; GPS.2 15.951,-5.421 17.541,-7.01 v1(32.36,-7.01) ; P7.0@21.769,-4.85 21.769,-1.853 22.352,-1.27 29.972,-1.27 32.563,1.321 37.084,1.321 37.644,1.881 ; P7.0@22.912,4.802 22.912,4.826 23.851,4.826 24.736,3.941 29.265,3.941 29.972,4.648 32.124,4.648 v1(32.327,4.445) ; P7.6 32.82,4.845 32.42,4.445 v1(32.327,4.445) ; v1(33.868,-5.866) 37.644,-5.866 37.644,-4.85 37.644,-1.016 ; P7.0@37.644,4.675 37.644,3.596 ; v1(45.822,0) 38.66,0 37.644,-1.016 ; v1(32.327,4.445) 33.176,3.596 37.644,3.596 ; 37.644,-1.016 37.644,1.881 ; 37.644,1.881 37.644,3.596
  Bottom Layer w0.5: P5.9 P5.10 P5.11 -32.385,-9.377 P5.8 ; -38.1,-8.763 -38.1,-8.415 ; -36.43,-8.415 -38.1,-8.415 ; U7.1@-34.674,-3.926 U7.1 -34.755,-3.627 -38.321,-3.627 -39.227,-4.533 -39.227,-5.93 P5.6 -38.1,-7.057 -38.1,-8.415 ; P5.8@-31.217,-9.377 -30.201,-9.377 -28.387,-11.191 -15.777,-11.191 ; C2.2 -23.916,1.23 -23.368,1.778 -23.368,4.953 -24.765,6.35 U2.5 ; v1(-15.443,-7.725) -16.463,-8.745 -16.463,-10.505 -15.777,-11.191 ; ch1.2 -15.777,-11.191 ; U3.1 v1(5.49,8.11)
led_tr: LED1.1 U1.58 | length 59.9
  Component Side w0.2: U1.58 -17.26,8.721 -14.551,11.43 39.395,11.43 39.629,11.196 LED1.1@39.629,10.406
MISO: U1.22 U7.7 | length 30.9
  Component Side w0.27: U1.22 -17.76,0.325
  Component Side w0.3: -17.76,0.325 v1(-15.799,2.286)
  Bottom Layer w0.3: U7.7 -34.565,4.805 -30.273,9.097 -22.61,9.097 v1(-15.799,2.286)
MOSI: U1.23 U7.6 | length 20.1
  Component Side w0.27: U1.23 -17.26,-0.14
  Component Side w0.3: -17.26,-0.14 v1(-16.637,0.483)
  Bottom Layer w0.3: U7.6 -30.99,0.229 -19.256,0.229 -19.002,0.483 v1(-16.637,0.483)
MPU_ADDR: R34.1 U5.9 U6.9 | length 9.4
  Component Side w0.18: U5.9 31.104,-1.535 R34.1@31.104,-3.351
  Component Side w0.229: U6.9 24.813,-1.801 26.409,-3.396
  Component Side w0.3: 26.409,-3.396 27.368,-3.396 27.413,-3.351 R34.1 R34.1@31.104,-3.351
MPU_REGOUT: C12.2 U5.10 U6.10 | length 11.6
  Component Side w0.18: U5.10 32.156,-2.021
  Component Side w0.229: U6.10 v1(26.12,-2.233)
  Component Side w0.3: 32.156,-2.021 32.183,-2.376 C12.2 32.36,-3.364 v1(32.36,-2.362)
  Bottom Layer w0.3: v1(26.12,-2.233) 27.368,-2.233 27.497,-2.362 v1(32.36,-2.362)
mpuIRQ: U1.33 U5.12 U6.12 | length 53.9
  Component Side w0.18: U5.12 v1(32.401,-0.346)
  Component Side w0.229: U6.12 26.416,-0.59 26.797,-0.971 v1(26.797,-2.819)
  Component Side w0.27: U1.33 -9.89,-1.591 -9.017,-2.464
  Component Side w0.3: -9.017,-2.464 v1(-6.198,-2.464)
  Bottom Layer w0.3: v1(-6.198,-2.464) -6.179,-2.482 4.514,-2.482 6.299,-4.267 16.866,-4.267 19.075,-6.477 23.139,-6.477 v1(26.797,-2.819) 26.924,-2.946 32.791,-2.946 32.944,-2.794 32.944,-0.889 v1(32.401,-0.346)
NetBUZ1_1: BUZ1.1 Q3.3 | length 7.1
  Component Side w0.3: BUZ1.1 0.409,6.739 1.422,6.739 1.43,6.731 2.751,6.731 Q3.3
NetC2_1: C2.1 C3.1 Q1.2 U2.4 | length 17
  Component Side w0.5: v1(-30.099,1.016) -30.099,-1.27 ; Q1.2 C3.1@-29.226,-4.823 ; C3.1 -29.21,-3.941 -30.099,-3.052 -30.099,-1.27 ; C2.1@-28.129,-1.459 C2.1 -30.099,-1.27
  Bottom Layer w0.5: v1(-30.099,1.016) -27.305,3.81 U2.4
NetC8_2: C8.2 R18.2 U1.7 | length 13.5
  Component Side w0.27: -24.257,2.229 -23.573,2.229 -22.893,2.909 U1.7
  Component Side w0.3: C8.2 -30.037,5.45 R18.2 -28.637,3.835 -28.88,3.593 -28.88,0.711 -28.448,0.279 -27.432,0.279 -25.482,2.229 -24.257,2.229
NetC14_2: C14.2 U6.20 | length 2.1
  Component Side w0.229: C14.2 22.033,2.564 U6.20
NetLED1_2: LED1.2 R5.2 | length 1.6
  Component Side w0.3: R5.2 36.957,10.606 37.157,10.406 LED1.2@37.832,10.406
NetLED2_K: LED2.K R9.2 | length 3.8
  Component Side w0.3: LED2.K 36.347,6.5 38.021,4.826 R9.2@38.555,4.826
NetLED3_1: LED3.1 R23.2 | length 1.3
  Component Side w0.3: R23.2 -24.308,-10.287 -24.3,-10.279 LED3.1
NetLED4_1: LED4.1 R28.2 | length 1.3
  Component Side w0.3: R28.2 -24.308,-8.255 -24.3,-8.247 LED4.1
NetLED5_1: LED5.1 Q4.1 R30.1 R32.1 | length 18.6
  Component Side w0.3: R30.1 -45.974,-1.6 -45.982,-1.592 LED5.1 -45.263,-0.894 -45.069,-0.7 R32.1 -40.349,-0.7 -38.608,1.041 -38.106,1.041 -36.646,2.502 -36.646,5.602 -37.481,6.437 Q4.1
NetLED6_1: LED6.1 Q5.1 R31.1 R33.1 | length 6.5
  Component Side w0.3: Q5.1 42.545,0.95 42.795,0.7 R33.1 44.988,0.7 45.182,0.894 LED6.1 45.982,1.549 45.974,1.557 R31.1
NetP3_1: P3.1 U2.9 | length 11.9
  Bottom Layer w0.9: P3.1 -9.984,-4.474 -6.78,-1.27 U2.9
NetP3_2: P3.2 U2.11 | length 5.6
  Bottom Layer w0.9: P3.2 -7.034,-6.604 -6.78,-6.35 U2.11
NetP3_3: P3.3 U2.10 | length 7.2
  Bottom Layer w0.9: P3.3 -8.509,-5.539 -6.78,-3.81 U2.10
NetQ1_1: Q1.1 R1.1 R2.2 | length 3
  Component Side w0.3: Q1.1 -29.226,-10.317 -29.272,-10.363 R1.1 -28.575,-11.049 -28.513,-10.987 R2.2
NetQ2_1: Q2.1 R5.1 | length 2
  Component Side w0.3: R5.1 36.522,9.206 36.522,8.702 37.207,8.702 37.339,8.57 Q2.1@37.762,8.57
NetQ2_3: Q2.3 R9.1 | length 3.4
  Component Side w0.3: Q2.3@39.962,7.62 39.962,6.954 41.455,5.461 R9.1@41.455,4.826
NetQ3_1: Q3.1 R29.1 | length 2.9
  Component Side w0.3: R29.1 0,7.747 0.315,8.062 Q3.1
NetR6_1: ch3.1 U2.8 | length 18.2
  Component Side w0.3: v1(-10.871,-7.518) -9.144,-7.518 -5.097,-3.471 -5.097,-0.643 v1(-6.96,1.219)
  Bottom Layer w0.3: ch3.1 -11.76,-9.791 -10.82,-8.851 -10.82,-7.569 v1(-10.871,-7.518) ; v1(-6.96,1.219) -6.909,1.27 U2.8
NetR7_1: ch2.1 U2.7 | length 22.5
  Component Side w0.3: v1(-7.964,-1.106) v1(-7.964,3.099)
  Bottom Layer w0.3: ch2.1 -13.919,-9.791 -13.919,-10.16 -14.177,-10.418 -15.805,-10.418 -15.936,-10.287 -15.936,-9.078 v1(-7.964,-1.106) ; v1(-7.964,3.099) -7.252,3.81 U2.7
NetR8_1: ch1.1 U2.6 | length 28.3
  Component Side w0.3: v1(-11.405,-8.28) -8.738,-8.28 -4.531,-4.074 -4.531,1.287 v1(-7.587,4.343)
  Bottom Layer w0.3: ch1.1 -15.113,-9.791 -15.113,-9.144 -14.249,-8.28 v1(-11.405,-8.28) ; v1(-7.587,4.343) -7.587,6.604 -7.438,6.753 -6.43,6.753 -6.43,6.35 U2.6
NetR15_2: R15.2 U1.44 | length 43.1
  Component Side w0.27: U1.44 -9.472,3.909 -9.322,3.759 -7.62,3.759
  Component Side w0.3: R15.2 -32.32,-5.955 v1(-31.953,-5.588) ; v1(-10.922,-3.048) -5.867,-3.048 -5.613,-2.794 -5.613,-1.346 -7.537,0.577 -7.537,1.499 -7.366,1.669 -7.366,3.505 -7.62,3.759
  Bottom Layer w0.3: v1(-31.953,-5.588) -29.052,-5.588 -27.528,-7.112 -14.986,-7.112 v1(-10.922,-3.048)
NetR16_2: R16.2 U1.45 | length 48.3
  Component Side w0.27: v1(-13.97,4.699) -12.878,4.699 -12.588,4.409 U1.45
  Component Side w0.3: R16.2 -39.141,-8.549 -39.141,-4.064 -38.608,-3.531 -37.084,-3.531 -36.219,-2.666 v1(-36.219,9.447)
  Bottom Layer w0.3: v1(-36.219,9.447) -35.715,9.951 -20.158,9.951 -14.906,4.699 v1(-13.97,4.699)
NetR17_2: R17.2 U4.2 | length 1.7
  Component Side w0.3: U4.2 -12.452,-9.423 R17.2@-12.415,-9.46
NetR20_2: R20.2 U1.26 | length 14.4
  Component Side w0.27: v1(-16.332,-1.321) -15.76,-1.893 U1.26
  Component Side w0.3: v1(-25.146,-5.893) -24.522,-5.269 R20.2
  Bottom Layer w0.3: v1(-25.146,-5.893) -20.904,-5.893 v1(-16.332,-1.321)
NetR21_2: R21.2 U1.28 | length 10.2
  Component Side w0.27: -15.906,-5.918 -14.76,-4.773 U1.28
  Component Side w0.3: R21.2 -22.606,-5.664 -22.352,-5.918 -15.906,-5.918
NetR24_1: R24.1 U1.6 X1.1 | length 4.6
  Component Side w0.27: R24.1 -23.622,2.856 -23.069,3.409 U1.6
  Component Side w0.3: X1.1 -25.154,3.88 R24.1
NetR24_2: R24.2 U1.5 X1.3 | length 6
  Component Side w0.27: R24.2@-23.687,4.256 -23.34,3.909 U1.5
  Component Side w0.3: X1.3 -24.511,6.28 -24.073,5.842 -24.073,4.313 R24.2 R24.2@-23.687,4.256
NetR26_1: R26.1 R27.2 U1.60 | length 10.4
  Component Side w0.27: v1(-18.694,6.375) -18.669,6.375 -18.26,6.784 U1.60
  Component Side w0.3: R27.2 -24.765,9.844 R26.1 -24.138,8.131 -21.409,8.131 v1(-20.828,8.712)
  Bottom Layer w0.3: v1(-20.828,8.712) -20.828,8.509 v1(-18.694,6.375)
nrf_irq: U1.27 U7.8 | length 27.6
  Component Side w0.27: v1(-15.348,0.889) -15.348,-3.303 U1.27
  Bottom Layer w0.3: U7.8 -32.025,6.075 -29.43,8.67 -23.129,8.67 v1(-15.348,0.889)
NRFCE: U1.20 U7.3 | length 44.5
  Component Side w0.27: U1.20 v1@-18.76,-0.214
  Component Side w0.3: v1(-18.821,-0.152) v1@-18.76,-0.214
  Bottom Layer w0.3: U7.3 -38.525,-1.277 -39.141,-0.66 -39.141,0.914 -38.608,1.448 -37.084,1.448 -35.756,2.776 -30.988,2.776 -30.251,3.513 -30.251,7.078 -29.087,8.243 -23.432,8.243 -16.06,0.871 -16.06,0.244 -16.456,-0.152 v1(-18.821,-0.152)
NRFCS: U1.17 U7.4 | length 19.8
  Component Side w0.27: v1(-22.377,-2.771) -20.26,-2.771 U1.17
  Component Side w0.3: U7.4 -32.025,-0.806 -30.676,0.543 -30.676,1.255 -30.338,1.593 -29.86,1.593 -29.307,1.04 -29.307,0.529 -28.448,-0.33 -26.924,-0.33 -26.543,-0.711 -26.543,-2.489 v1(-27.432,-3.378)
  Bottom Layer w0.3: v1(-27.432,-3.378) -27.432,-3.188 -27.015,-2.771 -26.856,-2.771 v1(-22.377,-2.771)
PARA: P8.2 Q4.3 R37.2 | length 8.5
  Component Side w0.3: P8.2 -42.415,3.305 R37.2 -42.415,4.956 -39.481,7.89 Q4.3
para_tr: R30.2 U1.59 | length 46
  Component Side w0.27: U1.59 -17.76,9.077 v1(-17.311,9.525)
  Component Side w0.3: v1(-45.974,-4.648) R30.2
  Bottom Layer w0.3: v1(-45.974,-4.648) -41.123,-4.648 -40.538,-4.064 -40.538,9.313 -39.474,10.378 -18.164,10.378 v1(-17.311,9.525)
RX: U1.43
SCK: U1.21 U7.5 | length 29.4
  Component Side w0.27: U1.21 -18.26,-2.879 -18.255,-2.879 v1(-18.255,1.735)
  Bottom Layer w0.3: U7.5 -33.479,2.349 -30.442,2.349 -29.743,3.048 -29.743,6.982 -28.91,7.816 -23.608,7.816 -18.255,2.463 v1(-18.255,1.735)
SCL: R22.2 U1.29 U5.23 U6.23 U8.4 | length 86
  Component Side w0.18: v1(28.094,1.549) 28.151,0.853 U5.23
  Component Side w0.229: 20.106,2.311 20.984,1.434 ; v1(21.184,2.616) 20.984,2.416 20.984,1.434 ; U6.23 20.984,1.434
  Component Side w0.27: U1.29 -14.26,0.142
  Component Side w0.3: -14.26,0.142 v1(-14.021,0.381) ; v1(17.831,2.311) 18.288,2.311 ; 20.106,2.311 18.288,2.311 ; R22.2 23.52,-7.939 23.62,-8.039 U8.4 24.171,-7.62 24.279,-7.512 26.411,-7.512 26.573,-7.674 26.573,-8.404 25.914,-9.063 21.522,-9.063 17.596,-5.137 17.596,1.619 18.288,2.311
  Bottom Layer w0.3: v1(-14.021,0.381) -14.148,0.508 -14.148,2.057 -12.573,3.632 -12.573,5.896 -10.61,7.859 -10.61,8.113 -10.272,8.451 -9.794,8.451 -9.347,8.004 -9.347,2.362 -9.017,2.032 -8.103,2.032 -7.391,2.743 -0.922,2.743 0.094,1.727 17.247,1.727 v1(17.831,2.311) ; v1(21.184,2.616) 27.027,2.616 v1(28.094,1.549)
SDA: R25.2 U1.30 U5.24 U6.24 U8.3 | length 62.9
  Component Side w0.18: v1(27.534,1.041) 27.534,0.665 27.838,0.361 U5.24
  Component Side w0.229: 19.748,-0.229 19.964,-0.229 v1(20.193,0) 20.32,0.127 20.32,0.889 20.508,1.077 20.627,1.077 U6.24
  Component Side w0.27: U1.30 -13.76,-1.924 v1(-13.665,-1.829)
  Component Side w0.3: v1(-2.032,-0.508) v1(0.508,-0.508) ; 19.748,-0.229 18.639,-0.229 18.023,-0.845 18.023,-4.866 21.096,-7.939 R25.2 21.63,-7.939 22.327,-8.636 24.567,-8.636 24.821,-8.382 U8.3
  Bottom Layer w0.3: v1(-13.665,-1.829) -10.52,-1.829 -8.923,-0.231 -3.427,-0.231 -3.15,-0.508 v1(-2.032,-0.508) ; v1(0.508,-0.508) 18.034,-0.508 18.542,0 v1(20.193,0) 26.902,0 27.534,0.632 v1(27.534,1.041)
SDIO_CLK: P7.5 U1.53 | length 51.7
  Component Side w0.27: U1.53 -14.76,8.923 -13.777,9.906 -13.722,9.906
  Component Side w0.3: -13.722,9.906 v1(-11.684,9.906) ; v1(7.747,9.471) 30.123,9.471 v1(30.374,9.22)
  Bottom Layer w0.3: v1(-11.684,9.906) -10.65,10.94 -9.692,10.94 -9.542,10.79 3.607,10.79 4.926,9.471 v1(7.747,9.471) ; v1(30.374,9.22) 31.72,7.874 P7.5
SDIO_CMD: P7.3 R19.1 U1.54 | length 80.6
  Component Side w0.27: U1.54 -15.236,7.733 -15.236,9.347 -14.447,10.135
  Component Side w0.3: -14.447,10.135 -14.1,10.483 -11.343,10.483 -10.647,9.786 -8.11,9.786 -6.999,10.897 29.518,10.897 31.699,8.716 31.699,5.334 31.572,5.207 30.48,5.207 29.82,5.867 29.82,6.285 R19.1 29.616,6.285 v1(29.616,3.378)
  Bottom Layer w0.3: P7.3 29.52,7.031 28.115,8.435 23.961,8.435 21.869,6.344 21.869,3.556 22.047,3.378 v1(29.616,3.378)
SDIO_D0: P7.7 R14.2 U1.39 | length 73.7
  Component Side w0.27: v1(-12.268,1.727) -11.95,1.409 U1.39
  Component Side w0.3: v1(-10.414,6.502) -7.341,6.502 v1(-7.01,6.172) ; v1(2.159,3.581) 3.302,2.438 v1(3.302,-1.905) ; v1(33.528,2.159) R14.2 33.63,9.206 33.63,4.318 v1(33.757,4.191)
  Bottom Layer w0.3: v1(-12.268,1.727) -10.414,3.581 v1(-10.414,6.502) ; v1(-7.01,6.172) -7.01,5.588 -6.731,5.309 -1.88,5.309 0.115,3.314 1.432,3.314 1.699,3.581 v1(2.159,3.581) ; v1(3.302,-1.905) 3.438,-1.769 16.145,-1.769 16.688,-2.311 19.583,-2.311 21.209,-0.686 28.118,-0.686 30.963,2.159 v1(33.528,2.159) ; v1(33.757,4.191) 33.92,4.354 P7.7
SDIO_D1: P7.8 R12.2 U1.40 | length 66.9
  Component Side w0.27: U1.40 -9.296,1.909 v1(-8.595,2.611)
  Component Side w0.3: R12.2 35.027,9.206 35.027,9.576 35.306,9.855 36.957,9.855 37.109,9.703 37.109,9.561 37.467,9.203 v1(38.383,9.203)
  Bottom Layer w0.3: v1(-8.595,2.611) -8.595,6.201 -7.406,7.389 -2.871,7.389 0.777,3.741 1.255,3.741 1.798,4.284 4.03,4.284 9.418,9.672 9.418,10.225 9.58,10.387 33.403,10.387 35.02,8.77 35.02,7.239 ; P7.8 35.02,7.239 ; v1(38.383,9.203) 36.984,9.203 35.02,7.239
SDIO_D2: P7.1 R11.2 U1.51 | length 45.8
  Component Side w0.27: U1.51 -13.76,8.706 -13.589,8.877 ; -13.561,8.905 -8.295,8.905
  Component Side w0.3: -13.589,8.877 -13.561,8.905 ; -8.295,8.905 -7.784,8.905 -6.646,10.043 5.351,10.043 6.928,8.467 17.518,8.467 19.736,6.248 v1(24.359,6.248) ; v1(26.035,6.248) 26.072,6.285 R11.2
  Bottom Layer w0.3: v1(24.359,6.248) v1(26.035,6.248) 26.289,6.502 27.32,6.502 P7.1
SDIO_D3: P7.2 R10.2 U1.52 | length 50.5
  Component Side w0.27: U1.52 -14.26,8.862 -13.793,9.329 -7.964,9.329 -7.757,9.535
  Component Side w0.3: -7.757,9.535 -6.822,10.47 5.659,10.47 7.235,8.894 22.475,8.894 v1(24.13,7.239) ; R10.2 28.321,4.928 v1(28.727,4.521)
  Bottom Layer w0.3: v1(24.13,7.239) 28.293,7.239 28.42,7.112 P7.2 28.42,5.055 28.727,4.747 v1(28.727,4.521)
SWCLK: P4.2 U1.49 | length 39.7
  Component Side w0.27: U1.49 -12.76,8.001 -10.16,8.001 v1(-10.033,7.874)
  Bottom Layer w0.3: v1(-10.033,7.874) -9.774,7.615 -9.774,2.185 -9.194,1.605 -7.666,1.605 -6.96,2.311 -3.327,2.311 0.254,-1.27 P4.2
SWDIO: P4.3 U1.46 | length 31.5
  Component Side w0.27: U1.46 -5.138,4.909
  Component Side w0.3: -5.138,4.909 -2.261,2.032 v1(-1.524,2.032)
  Bottom Layer w0.3: v1(-1.524,2.032) -0.792,1.3 19.02,1.3 P4.3
TX: U1.42
USB_D+: P5.3 R13.1 R16.1 | length 7.3
  Component Side w0.3: v1(-37.008,-5.588) -37.4,-5.98 R16.1 R13.1
  Bottom Layer w0.3: v1(-37.008,-5.588) -35.484,-5.588 -35.23,-5.842 P5.3
USB_D-: P5.2 R15.1 | length 4.8
  Component Side w0.3: v1(-34.228,-5.588) -33.72,-6.096 R15.1
  Bottom Layer w0.3: P5.2 -34.58,-5.94 v1(-34.228,-5.588)
pads on no net: LED2.t-pad P5.4 P7. S1.1 S1.4 S1.5 S1.6 U1.2 U1.3 U1.4 U1.10 U1.11 U1.14 U1.15 U1.24 U1.25 U1.36 U1.37 U1.38 U1.41 U1.50 U1.55 U5.2 U5.3 U5.4 U5.5 U5.6 U5.7 U5.11 U5.14 U5.15 U5.16 U5.17 U5.19 U5.21 U5.22 U5.25 U6.2 U6.3 U6.4 U6.5 U6.6 U6.7 U6.14 U6.15 U6.16 U6.17 U6.19 U6.21 U6.22 U8.1 U8.2

## Polygon pours and split planes (outlines as drawn)
GND on Component Side "Component Side-No Net" (solid, pour order 0): -46.99,12.065 46.99,12.065 46.99,-12.065 -46.99,-12.065
GND on Bottom Layer "Component Side-No Net" (solid, pour order 2): -46.99,12.065 46.99,12.065 46.99,-12.065 -46.99,-12.065

## Other copper
Component Side:
  pour cut-out: -46.99,12.065 46.99,12.065 46.99,11.506 -46.99,11.506
  pour cut-out: -46.99,-11.506 46.99,-11.506 46.99,-12.065 -46.99,-12.065
  pour cut-out: -10.809,-11.354 -10.809,-4.23 -6.731,-0.152 -6.729,-0.155 -3.427,-0.155 -3.427,-11.351 -3.429,-11.354
Bottom Layer:
  pour cut-out: -46.99,-11.506 46.99,-11.506 46.99,-12.065 -46.99,-12.065
  pour cut-out: -46.99,12.065 46.99,12.065 46.99,11.506 -46.99,11.506
  pour cut-out: -10.809,-11.43 -10.809,-4.307 -6.731,-0.229 -6.729,-0.231 -3.427,-0.231 -3.427,-11.428 -3.429,-11.43

## Silkscreen, mask and mechanical layers (free items; w line width, h text height)
Top Overlay:
  text "para." at -41.529,-11.049 h1.52
  text "Rocket Logger V3.0" at -8.315,-11.04 h1.52
  text "engine" at 32.385,-11.049 h1.52
Bottom Overlay:
  text "parachute" at -28.575,9.652 h1.52
  text "engine" at 40.767,9.652 h1.52
  text "Video ant" at 2.54,-11.938 h1
Mechanical 2:
  the board outline again, w0.254
Mechanical 15:
  circle w0.1: c-43.815,8.89 r3
  circle w0.1: c-43.815,-8.89 r3
  circle w0.1: c43.815,-8.89 r3
  circle w0.1: c43.815,8.89 r3
  lines w0.2: -46.99,0 46.99,0

## Text inside footprints (layer, text, board x,y; h text height)
BUZ1: Top Overlay "+" at -3.24,-6.67 h1.52 r270
C2: Top Overlay "+" at -27.19,-4.72 h1.5 r90
U5: Mechanical 13 "Z" at 29.898,-1.001 h0.4 r45; Mechanical 13 "x" at 30.428,0.378 h0.4 r45; Mechanical 13 "Y" at 29.262,0.414 h0.4 r45